# EAGLE board Led_Cube v25 (EAGLE 9.7.0)
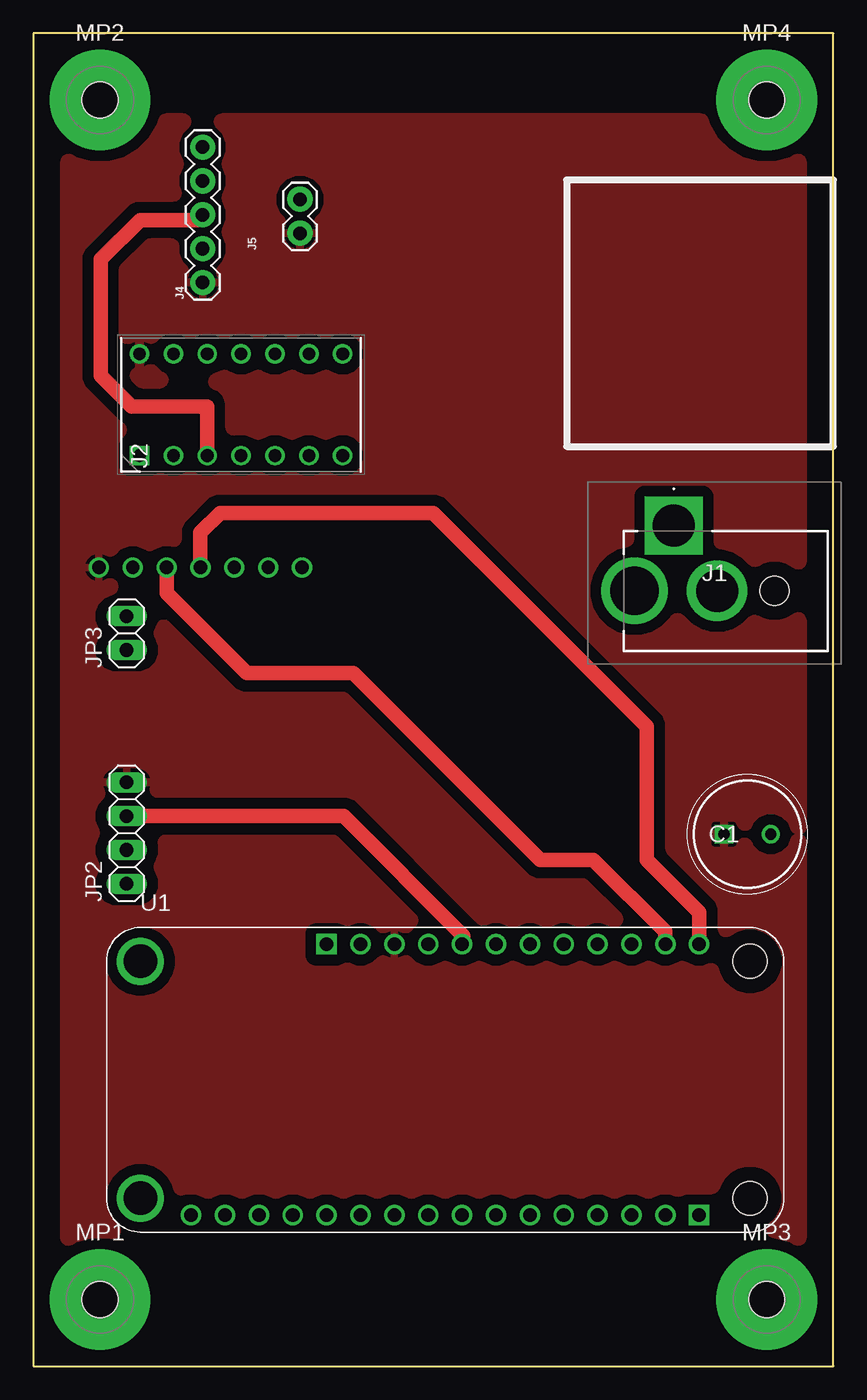
[diagram p0: board, top side]
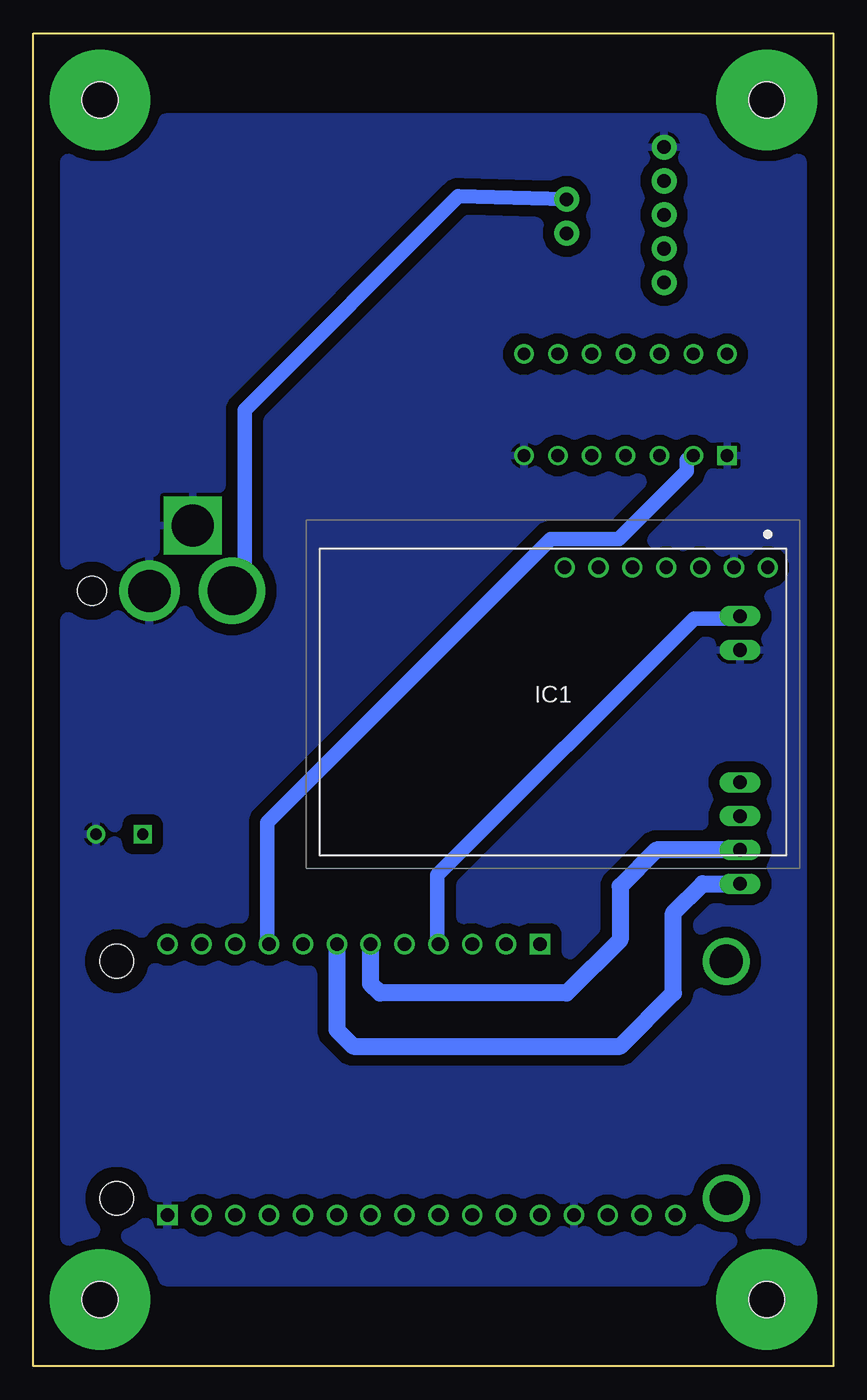
[diagram p1: board, bottom side, seen from below]

Size 60 x 100 mm. Coordinates in mm from the lower left corner, seen from the top.
Outline: 0,0 60,0 60,100 0,100 0,0
Copper layers (1*16): Top / Bottom
Stack-up 2 Layer Stack: Top SilkScreen Epoxy Ink / Top SolderMask SR:Green 0.0254mm Dk 4.3 / Top Surface Finish Lead-Free 0.02mm / Top CuFoil:007 0.035mm / Dielectric-1 Core:084 1.067mm / Bottom CuFoil:007 0.035mm / Bottom Surface Finish Lead-Free 0.02mm / Bottom SolderMask SR:Green 0.0254mm Dk 4.3 / Bottom SilkScreen Epoxy Ink
Design rules: minimum drill size 0.35mm, minimum copper width 1.1mm, keepout clearance 0mil, drill distance 0.13mm, dimension clearance 1.1mm, restrict clearance 0mil, copper clearance wire_polygon to wire_polygon 0.6mm, copper clearance wire_polygon to pad_smd 0.4mm, copper clearance wire_polygon to via 0.4mm, copper clearance smd to pad (same net) 6mil, copper clearance smd to via (same net) 6mil, copper clearance smd to smd (same net) 6mil, copper clearance pad_smd to via 0.14mm, copper clearance via to via 0.14mm, copper clearance pad_smd to pad_smd 0.11mm

## Footprints (pad centres in the part's own frame; a part is rotated, then mirrored left to right if it is on the bottom)
CAPPRD350W65D800H1250 = drill 0.85 pad 1.275 square: 1 0,0 | drill 0.85 pad 1.275: 2 3.5,0
SCD30 = drill 1 pad 1.5: 1 0,0; 2 -2.54,0; 3 -5.08,0; 4 -7.62,0; 5 -10.16,0; 6 -12.7,0; 7 -15.24,0
PPW01010 = drill 3.16 pad 4.34 square: B1 0,0 | drill 3.64 pad 5: J1 2.95,4.9 | drill 3.16 pad 4.54: S1 -3.25,4.9 | hole 2.2: -7.55,4.9
DIPS762W70P254L1778H510Q14N = drill 0.95 pad 1.425 square: 1 0,0 | drill 0.95 pad 1.425: 2 0,-2.54; 3 0,-5.08; 4 0,-7.62; 5 0,-10.16; 6 0,-12.7; 7 0,-15.24; 8 7.62,-15.24; 9 7.62,-12.7; 10 7.62,-10.16; 11 7.62,-7.62; 12 7.62,-5.08; 13 7.62,-2.54; 14 7.62,0
1X05 = drill 1.016 pad 1.88: 1 0,0; 2 2.54,0; 3 5.08,0; 4 7.62,0; 5 10.16,0
1X02 = drill 1.016 pad 1.88: 1 0,0; 2 2.54,0
1X04 = drill 1.016 long: 1 -3.81,0; 2 -1.27,0; 3 1.27,0; 4 3.81,0
1X02' = drill 1.016 long: 1 -1.27,0; 2 1.27,0
STANDOFF_HEX_FEMALE_500X2000_M2.5X0.45_MTGP755H270 = drill 2.7 pad 7.55: 1 0,0 | hole 2.7: 0,0
MODULE_FEATHER_M0_BASIC_PROTO = drill 1.02 square: P1_1 19.05,-10.16; P2_1 -8.89,10.16 | drill 1.02: P1_2 16.51,-10.16; P1_3 13.97,-10.16; P1_4 11.43,-10.16; P1_5 8.89,-10.16; P1_6 6.35,-10.16; P1_7 3.81,-10.16; P1_8 1.27,-10.16; P1_9 -1.27,-10.16; P1_10 -3.81,-10.16; P1_11 -6.35,-10.16; P1_12 -8.89,-10.16; P1_13 -11.43,-10.16; P1_14 -13.97,-10.16; P1_15 -16.51,-10.16; P1_16 -19.05,-10.16; P2_2 -6.35,10.16; P2_3 -3.81,10.16; P2_4 -1.27,10.16; P2_5 1.27,10.16; P2_6 3.81,10.16; P2_7 6.35,10.16; P2_8 8.89,10.16; P2_9 11.43,10.16; P2_10 13.97,10.16; P2_11 16.51,10.16; P2_12 19.05,10.16 | drill 2.5 pad 3.2: P$1 -22.86,8.89; P$2 -22.86,-8.89 | hole 2.54: 22.86,-8.89; 22.86,8.89

## Placement (x,y rotation side)
C1  ECA0JHG102  [CAPPRD350W65D800H1250]  51.8,39.91 0 top
IC1  SCD30  [SCD30]  4.91,59.93 0 bottom
J1  PPW01010  [PPW01010]  48.04,63.07 180 top
J2  1-2199298-3  [DIPS762W70P254L1778H510Q14N]  7.96,68.32 90 top
J4  [1X05]  12.7,81.3 90 top
J5  [1X02]  20,85 90 top
JP2  PINHD-1X4  [1X04]  7,40 90 top
JP3  PINHD-1X2  [1X02']  7,55 90 top
MP1  STANDOFF_F/F_M2.5_20MM  [STANDOFF_HEX_FEMALE_500X2000_M2.5X0.45_MTGP755H270]  5,5 0 top
MP2  STANDOFF_F/F_M2.5_20MM  [STANDOFF_HEX_FEMALE_500X2000_M2.5X0.45_MTGP755H270]  5,95 0 top
MP3  STANDOFF_F/F_M2.5_20MM  [STANDOFF_HEX_FEMALE_500X2000_M2.5X0.45_MTGP755H270]  55,5 0 top
MP4  STANDOFF_F/F_M2.5_20MM  [STANDOFF_HEX_FEMALE_500X2000_M2.5X0.45_MTGP755H270]  55,95 0 top
U1  FEATHER_M0_BASIC_PROTO  [MODULE_FEATHER_M0_BASIC_PROTO]  30.89,21.49 0 top

## Library data of the parts
C1 = Library; DESCRIPTION: Panasonic 1000F 6.3V dc Aluminium Electrolytic Capacitor, Through Hole 8 (Dia.) x 11.5mm +105C 8mm 3.5mm; HEIGHT: 12.5mm; MANUFACTURER_NAME: Panasonic; MANUFACTURER_PART_NUMBER: ECA0JHG102
IC1 = SCD30; DESCRIPTION: SENSIRION - SCD30 - GAS SENSOR, CO2, 0.075A/5.5V, 40000PPM; HEIGHT: 7mm; MANUFACTURER_NAME: Sensirion; MANUFACTURER_PART_NUMBER: SCD30
J1 = PPW01010; DESCRIPTION: PRO POWER - PPW01010 - DC Power Connector, Receptacle, 2.1 mm, PCB Mount, Solder; HEIGHT: 11.3mm; MANUFACTURER_NAME: PRO POWER; MANUFACTURER_PART_NUMBER: PPW01010
J2 = 7 Dip IC Socket; DESCRIPTION: 2.54mm low profile THT DIL socket,14 way TE Connectivity 1-2199298 2.54mm Pitch Straight 14 Way, Through Hole Standard Pin Ladder IC Dip Socket, 1A; HEIGHT: 5.1mm; MANUFACTURER_NAME: TE Connectivity; MANUFACTURER_PART_NUMBER: 1-2199298-3
J4 J5 = SparkFun-Connectors
JP2 = Connector; CATEGORY: Headers; DESCRIPTION: Header, Straight, 4 Position; MANUFACTURER: Generic; MPN: Generic; OPERATING_TEMPERATURE: Generic; PART_STATUS: Active; PITCH: 0.100" (2.54mm); ROHS_COMPLIANCE: Generic; SERIES: Generic; SUB-CATEGORY: Headers, Male Pins; TYPE: Board to Board or Cable, Unshrouded, Through Hole, Straight
JP3 = Connector; CATEGORY: Headers; DESCRIPTION: Header, Straight, 2 Position; MANUFACTURER: Generic; MPN: Generic; OPERATING_TEMPERATURE: Generic; PART_STATUS: Active; PITCH: 0.100" (2.54mm); ROHS_COMPLIANCE: Generic; SERIES: Generic; SUB-CATEGORY: Headers, Male Pins; TYPE: Board to Board or Cable, Unshrouded, Through Hole, Straight
MP1-MP4 = PCB-Fasteners_Hardware; CATEGORY: Standoff/Spacer; SUB-CATEGORY: Female-Female
U1 = feather m0; AVAILABILITY: Not in stock; CHECK_PRICES: https://www.snapeda.com/parts/Feather%20M0%20Basic%20Proto/Adafruit+Industries/view-part/?ref=eda; DESCRIPTION: ATSAMD21G18 Feather M0 Basic Proto series ARM® Cortex®-M0+ MCU 32-Bit Embedded Evaluation Board; MF: Adafruit Industries; MP: Feather M0 Basic Proto; PACKAGE: None; PRICE: None; SNAPEDA_LINK: https://www.snapeda.com/parts/Feather%20M0%20Basic%20Proto/Adafruit+Industries/view-part/?ref=snap

## Nets
3V3: U1.P1_15
BLUE: JP2.3 U1.P2_5
DATA: J2.2 U1.P2_9
DGND: C1.2 IC1.2 J1.B1 J1.S1 J2.1 J2.7 J4.5 JP3.1 U1.P1_1 U1.P1_13
DIN: J2.3 J4.3
GREEN: JP2.2 U1.P2_6
N$4: J1.J1 J5.2
RED: JP2.1 U1.P2_7
SCL: IC1.3 U1.P2_11
SDA: IC1.4 U1.P2_12
SW1: JP3.2 U1.P2_4
VBAT: U1.P2_1
VCC: C1.1 IC1.1 J2.14 J4.1 J5.1 JP2.4 U1.P2_3

## Tracks (layer width: path | path; a pad name or v marks a point on that pad's centre or on a via)
BLUE
  Top 1.1: U1.P2_5 32.25,32.3 23.28,41.27 JP2.3
DATA
  Bottom 1.1: J2.2 11,68 11,67.15 16.1,62.05 21.2,62.05 42.45,40.8 42.45,32.3 U1.P2_9
DGND
  pour Bottom (isolate 0.813): 2,94 58,94 58,6 2,6
DIN
  Top 1.1: J2.3 13.04,72 7.37,72 5.05,74.31 5.05,83.05 8,86 12.31,86 J4.3
GREEN
  Bottom 1.27: JP2.2 13.27,38.73 16,36 16,32 20,28 34,28 34.7,28.7 U1.P2_6
N$4
  Bottom 1.1: J5.2 28.13,87.77 44.15,71.75 44.15,59.5 45,58.65 J1.J1
RED
  Bottom 1.27: U1.P2_7 37.24,25.24 36,24 16,24 12,28 12,34 9.81,36.19 JP2.1
SCL
  Top 1.1: IC1.3 10,58 16,52 24,52 38,38 42,38 47.4,32.6 U1.P2_11
SDA
  Top 1.1: IC1.4 12.53,62.53 14,64 30,64 46,48 46,38 49.94,34.06 U1.P2_12
SW1
  Bottom 1.1: JP3.2 7.6,56.1 10.45,56.1 29.7,36.85 29.7,32.3 U1.P2_4
VCC
  pour Top (isolate 0.813): 8,94 58,94 58,6 2,6 2,94 10,94